# Altium PCB MainSensorV1.PcbDoc (part 1 of 3)
Units mm, origin at the board's own origin, x right, y up, seen from the top; angles counter-clockwise.
Board outline 100 x 40.64 mm, 2 copper layers (Top Layer, Bottom Layer); 164 components, 84 nets, 408 pads, 582 vias.
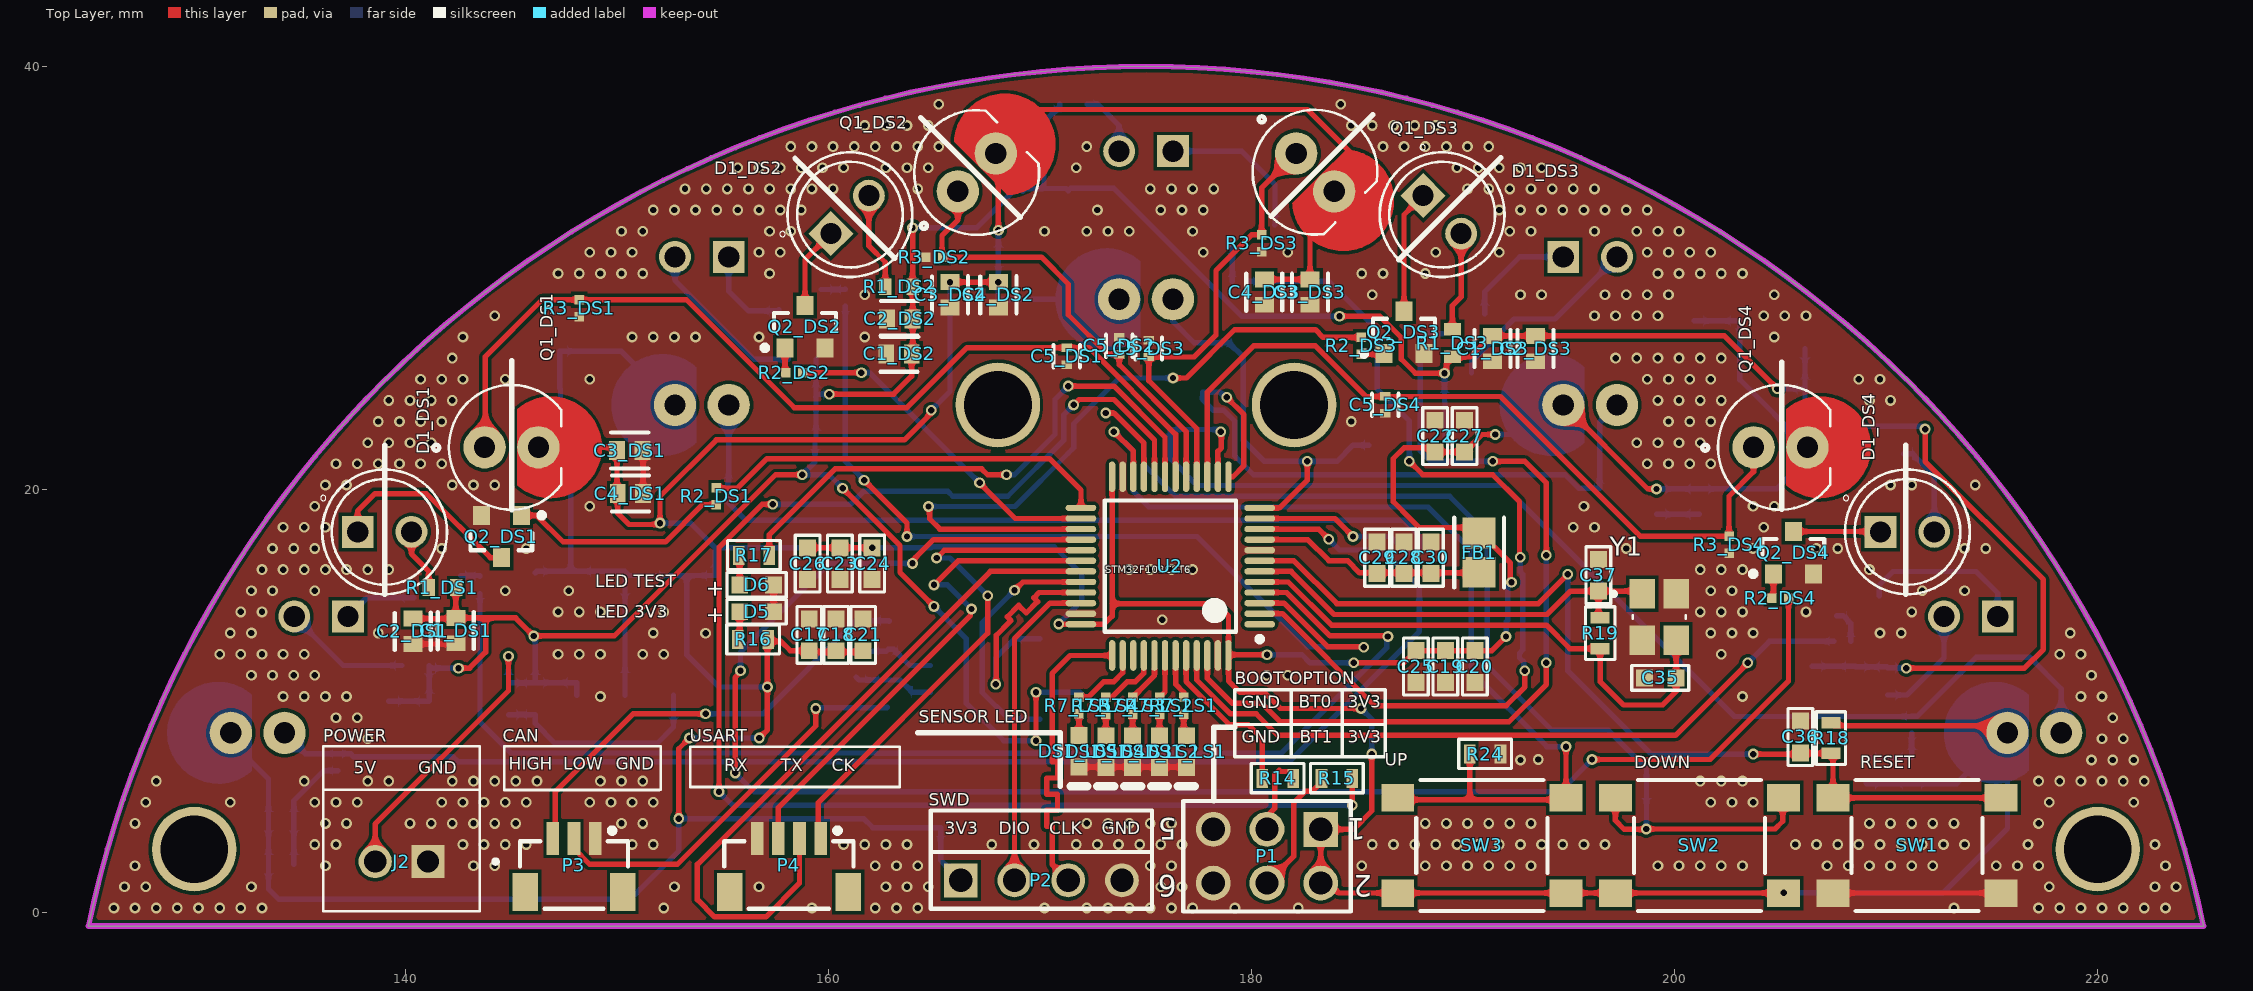
[diagram p0: Top Layer view]
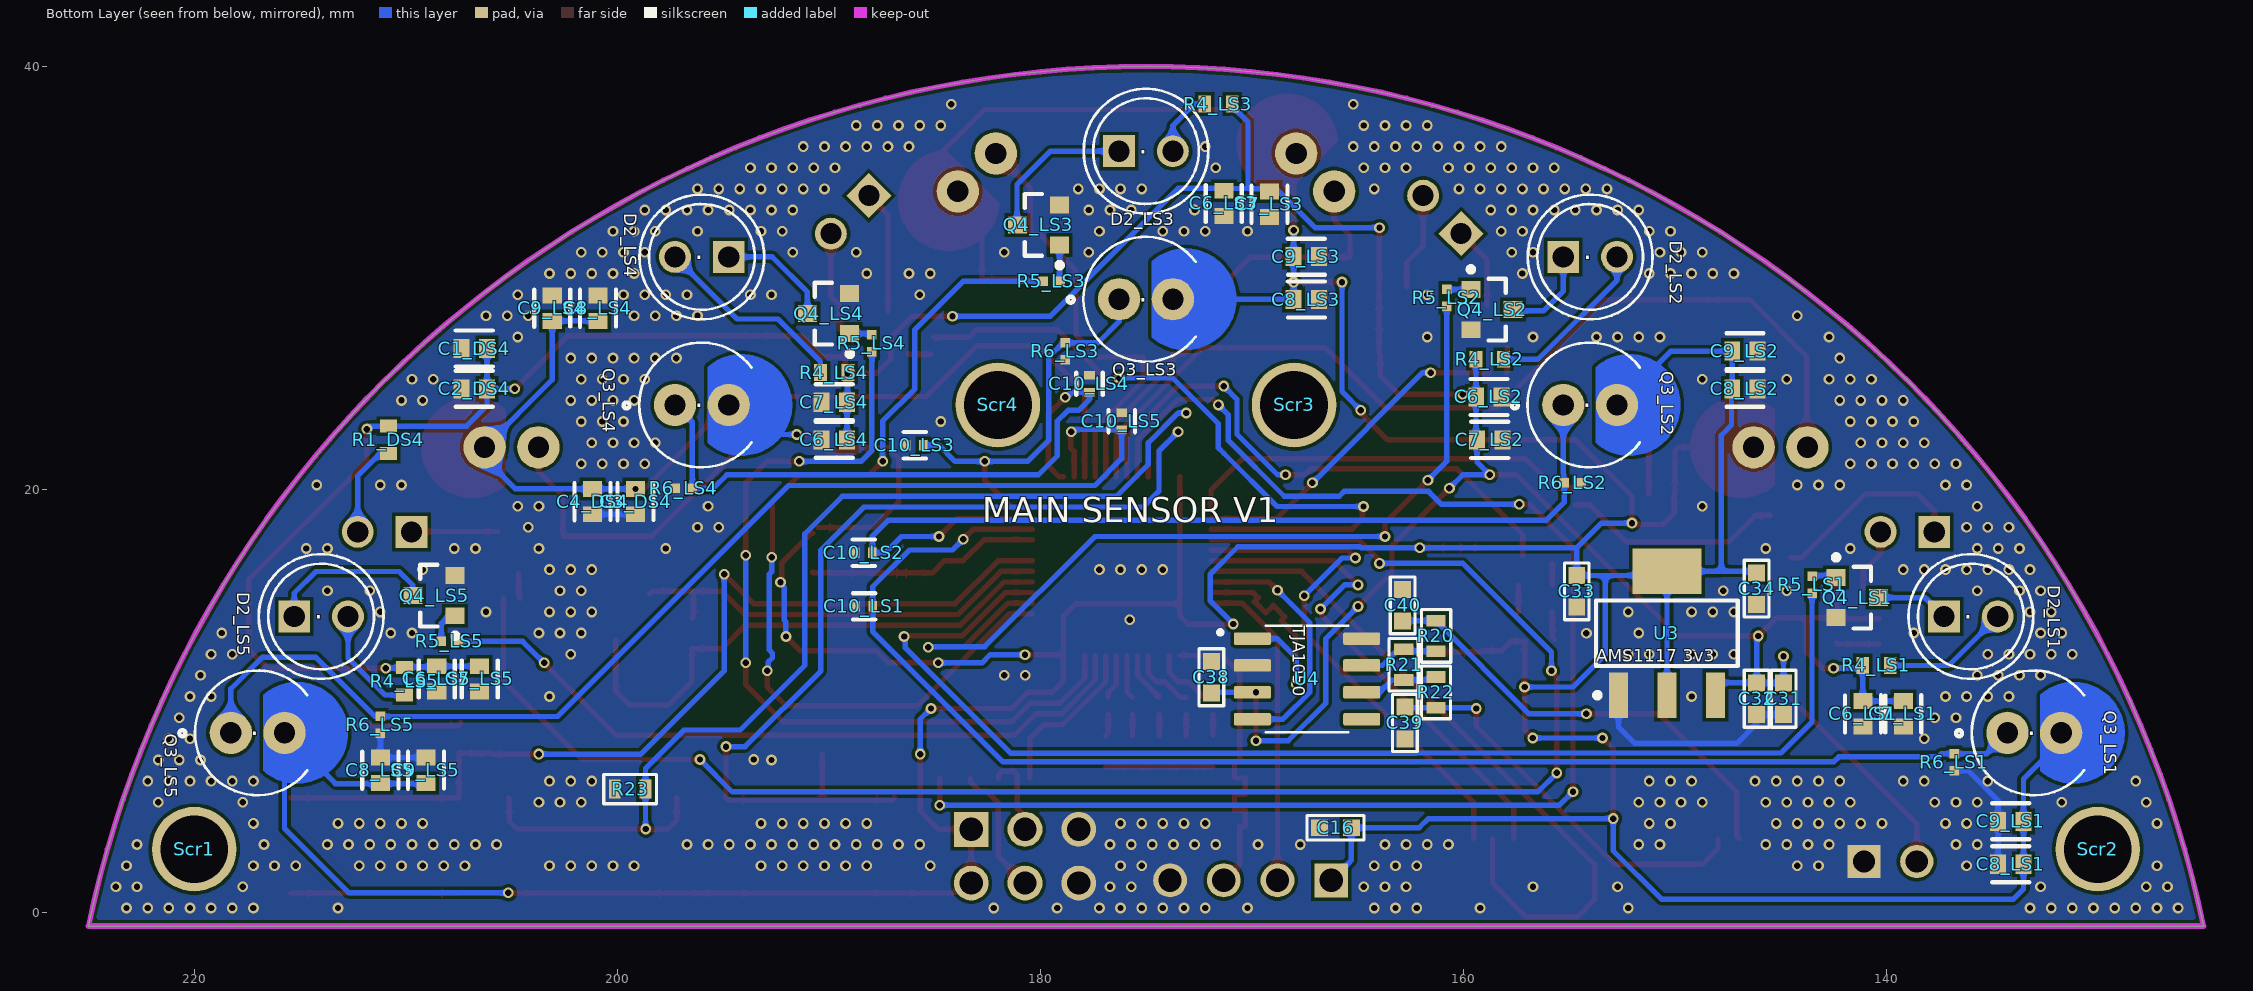
[diagram p1: Bottom Layer view, seen from below]
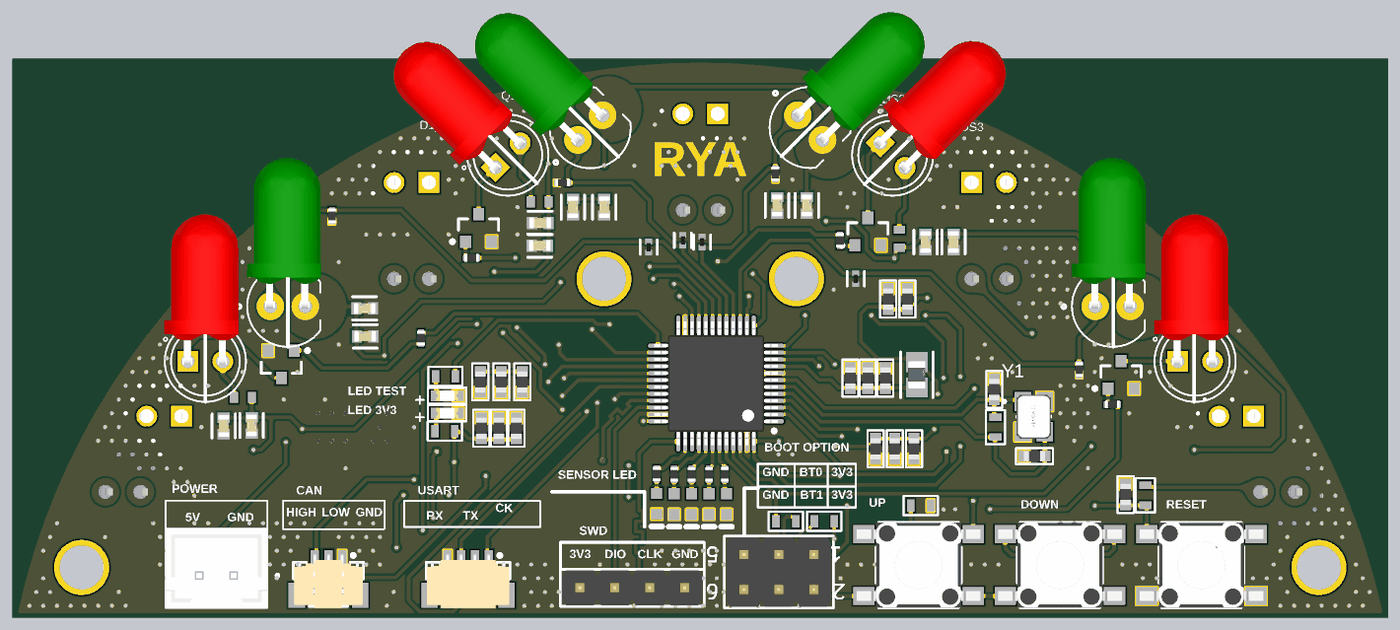
[diagram p3: 3D render of the assembled board from above, using the file's embedded part models]
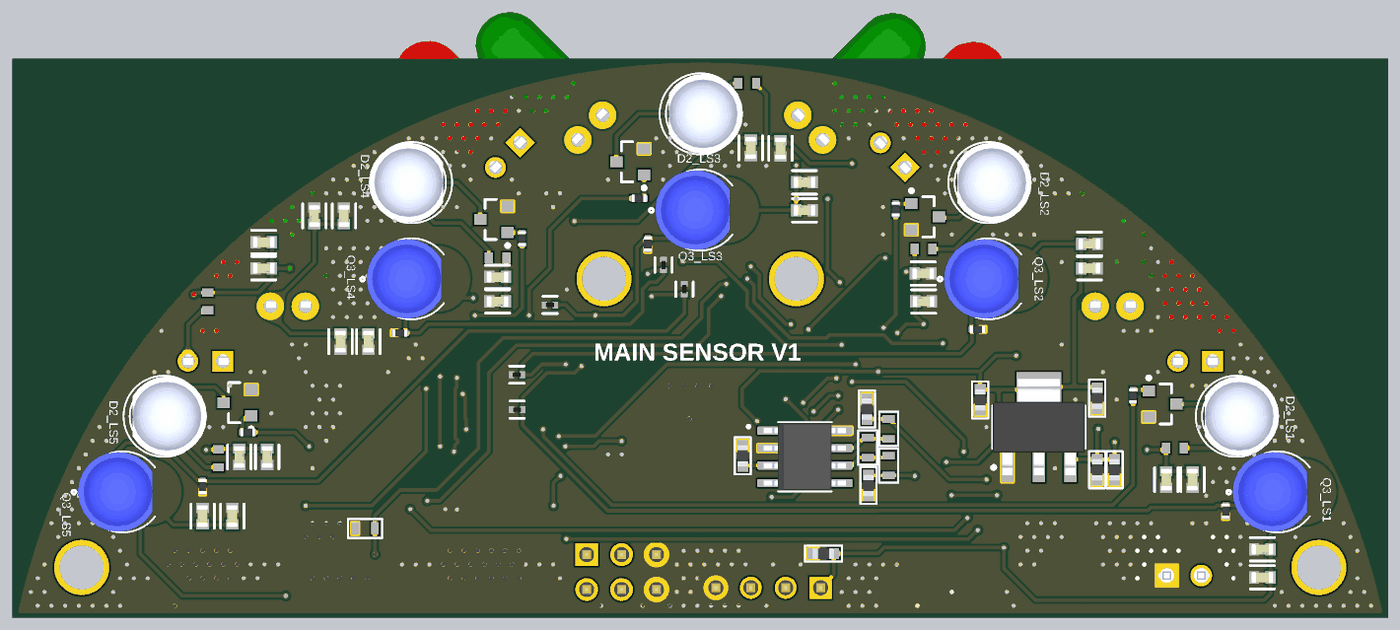
[diagram p4: 3D render of the assembled board from below, using the file's embedded part models]

## Layer stack, top to bottom
Top Solder: solder mask 0.0102, Solder Resist, Dk 3.5
Top Layer: signal copper 0.0356
Dielectric 1: dielectric 0.32, FR-4, Dk 4.8
Bottom Layer: signal copper 0.0356
Bottom Solder: solder mask 0.0102, Solder Resist, Dk 3.5

## Board outline
125,-0.635 225,-0.635 ccw(c175,-11.073)

## Design rules (kind name [scope] priority, off if disabled: settings)
Clearance [All] p1: gap=0.152 ignorepadtopadclearanceinfootprint=FALSE
HoleSize [All] p1: absolutevalues=TRUE maxlimit=20.54 minlimit=0.3 maxpercent=80.000 minpercent=20.000
MatchedLengths [InNetClass('STLINK')] p1: tolerance=25.4 checknetsindiffpair=FALSE checkdiffpairvsdiffpair=TRUE checkxsignals=TRUE checkothers=TRUE usedelayunits=TRUE delaytolerance=1.000000
PolygonConnect PolygonConnect_4 [All vs IsNamedPolygon('3V3_L02_P007')] p1: connectstyle=Direct reliefconductorwidth=0.254 reliefentries=4 polygonreliefangle="90 Angle" airgapwidth=0.254
PolygonConnect PolygonConnect_3 [All vs IsNamedPolygon('3V3_L02_P003')] p2: connectstyle=Direct reliefconductorwidth=0.254 reliefentries=4 polygonreliefangle="90 Angle" airgapwidth=0.254
PolygonConnect PolygonConnect_2 [All vs IsNamedPolygon('3V3_L02_P001')] p3: connectstyle=Direct reliefconductorwidth=0.254 reliefentries=4 polygonreliefangle="90 Angle" airgapwidth=0.254
PolygonConnect PolygonConnect_1 [All vs IsNamedPolygon('5V_L02_P000')] p4: connectstyle=Direct reliefconductorwidth=0.254 reliefentries=4 polygonreliefangle="90 Angle" airgapwidth=0.254
PolygonConnect [InNet('GND') vs InNet('GND')] p5: connectstyle=Direct reliefconductorwidth=0.254 reliefentries=4 polygonreliefangle="90 Angle" airgapwidth=0.254
RoomDefinition U_MCU [InComponentClass('U_MCU')] p1: confinementstyle=ConfineIn formatcopy=TRUE lockcomponents=FALSE outline -26.797,-41.783 24.003,-41.783 24.003,-16.383 -26.797,-16.383
RoomDefinition U_CAN_IC [InComponentClass('U_CAN_IC')] p2: confinementstyle=ConfineIn formatcopy=TRUE lockcomponents=FALSE outline -26.797,-41.783 24.003,-41.783 24.003,-16.383 -26.797,-16.383
RoomDefinition U_BUTTON [InComponentClass('U_BUTTON')] p3: confinementstyle=ConfineIn formatcopy=TRUE lockcomponents=FALSE outline -26.797,-41.783 24.003,-41.783 24.003,-16.383 -26.797,-16.383
RoutingVias [All] p1: holewidth=0.3 width=0.762 viastyle="Through Hole" minholewidth=0.3 minwidth=0.3 maxholewidth=0.3 maxwidth=0.762
SilkToSilkClearance [All] p1: silktosilkclearance=0
SilkToSolderMaskClearance [IsPad] p1: minsilkscreentomaskgap=0 clearancetoexposedcopper=TRUE
SolderMaskExpansion [All] p1: expansion=0.102 istentingtop=FALSE
SupplyNets "Schematic Supply Nets_2" [InNet('3V3')] p1: voltage=0.000
SupplyNets "Schematic Supply Nets_1" [InNet('GND')] p2: voltage=0.000
SupplyNets "Schematic Supply Nets" [InNet('5V')] p3: voltage=0.000
Width [All] p1: maxlimit=0.508 minlimit=0.254 preferedwidth=0.381 minimp=50.000000 maximp=50.000000 favimp=50.000000
27 further rules are at their usual default settings.

## Classes and differential pairs
component class U_MCU: C16 C17 C18 C19 C20 C21 C22 C23 C24 C25 C26 C27 C28 C29 C30 C31 C32 C33 C34 C35 C36 C37 D5 D6 FB1 P1 P2 R14 R15 R16 R17 R18 R19 SW1 U2 U3 Y1
component class U_CAN_IC: C38 C39 C40 R20 R21 R22 U4
component class U_BUTTON: R23 R24 SW2 SW3
component class LS5: C6_LS5 C7_LS5 C8_LS5 C9_LS5 C10_LS5 D2_LS5 DS1_LS5 Q3_LS5 Q4_LS5 R4_LS5 R5_LS5 R6_LS5 R7_LS5
component class LS4: C6_LS4 C7_LS4 C8_LS4 C9_LS4 C10_LS4 D2_LS4 DS1_LS4 Q3_LS4 Q4_LS4 R4_LS4 R5_LS4 R6_LS4 R7_LS4
component class LS3: C6_LS3 C7_LS3 C8_LS3 C9_LS3 C10_LS3 D2_LS3 DS1_LS3 Q3_LS3 Q4_LS3 R4_LS3 R5_LS3 R6_LS3 R7_LS3
channel class LINE_SENSOR: LS1 LS2 LS3 LS4 LS5
channel class DIS_SENSOR: DS1 DS2 DS3 DS4
component class Sensor: J2 P3 P4
component class LS2: C6_LS2 C7_LS2 C8_LS2 C9_LS2 C10_LS2 D2_LS2 DS1_LS2 Q3_LS2 Q4_LS2 R4_LS2 R5_LS2 R6_LS2 R7_LS2
component class LS1: C6_LS1 C7_LS1 C8_LS1 C9_LS1 C10_LS1 D2_LS1 DS1_LS1 Q3_LS1 Q4_LS1 R4_LS1 R5_LS1 R6_LS1 R7_LS1
component class Information: Scr1 Scr2 Scr3 Scr4
component class DS4: C1_DS4 C2_DS4 C3_DS4 C4_DS4 C5_DS4 D1_DS4 Q1_DS4 Q2_DS4 R1_DS4 R2_DS4 R3_DS4
component class DS3: C1_DS3 C2_DS3 C3_DS3 C4_DS3 C5_DS3 D1_DS3 Q1_DS3 Q2_DS3 R1_DS3 R2_DS3 R3_DS3
component class DS2: C1_DS2 C2_DS2 C3_DS2 C4_DS2 C5_DS2 D1_DS2 Q1_DS2 Q2_DS2 R1_DS2 R2_DS2 R3_DS2
component class DS1: C1_DS1 C2_DS1 C3_DS1 C4_DS1 C5_DS1 D1_DS1 Q1_DS1 Q2_DS1 R1_DS1 R2_DS1 R3_DS1

## Components (designator, comment, footprint, x,y, rotation, side; value= is the part's Value field where it differs from the comment)
C1_DS1 "100nF" FP-C0603C-CF-MFG 142.367,13.335 r270 top value="20 pF" (schematic designator C1)
C1_DS2 "100nF" FP-C0603C-CF-MFG 163.322,26.416 r180 top value="20 pF" (schematic designator C1)
C1_DS3 "100nF" FP-C0603C-CF-MFG 191.389,26.67 r270 top value="20 pF" (schematic designator C1)
C1_DS4 "100nF" FP-C0603C-CF-MFG 206.756,26.67 r0 bottom value="20 pF" (schematic designator C1)
C2_DS1 "10uF" FP-C0603C-CF-MFG 140.335,13.3 r270 top value="20 pF" (schematic designator C2)
C2_DS2 "10uF" FP-C0603C-CF-MFG 163.357,28.067 r180 top value="20 pF" (schematic designator C2)
C2_DS3 "10uF" FP-C0603C-CF-MFG 193.421,26.67 r270 top value="20 pF" (schematic designator C2)
C2_DS4 "10uF" FP-C0603C-CF-MFG 206.756,24.765 r0 bottom value="20 pF" (schematic designator C2)
C3_DS1 "100nF" FP-C0603C-CF-MFG 150.587,21.844 r0 top value="20 pF" (schematic designator C3)
C3_DS2 "100nF" FP-C0603C-CF-MFG 165.735,29.21 r270 top value="20 pF" (schematic designator C3)
C3_DS3 "100nF" FP-C0603C-CF-MFG 182.753,29.337 r270 top value="20 pF" (schematic designator C3)
C3_DS4 "100nF" FP-C0603C-CF-MFG 199.136,19.431 r270 bottom value="20 pF" (schematic designator C3)
C4_DS1 "10uF" FP-C0603C-CF-MFG 150.622,19.812 r0 top value="20 pF" (schematic designator C4)
C4_DS2 "10uF" FP-C0603C-CF-MFG 168.021,29.21 r270 top value="20 pF" (schematic designator C4)
C4_DS3 "10uF" FP-C0603C-CF-MFG 180.594,29.337 r270 top value="20 pF" (schematic designator C4)
C4_DS4 "10uF" FP-C0603C-CF-MFG 201.168,19.431 r270 bottom value="20 pF" (schematic designator C4)
C5_DS1 "100nF" FP-GRM15-MFG 171.25,26.308 r90 top value=0.10μF (schematic designator C5)
C5_DS2 "100nF" FP-GRM15-MFG 173.736,26.797 r270 top value=0.10μF (schematic designator C5)
C5_DS3 "100nF" FP-GRM15-MFG 175.133,26.67 r270 top value=0.10μF (schematic designator C5)
C5_DS4 "100nF" FP-GRM15-MFG 186.309,24.003 r90 top value=0.10μF (schematic designator C5)
C6_LS1 "100nF" FP-C0603C-CF-MFG 141.097,9.398 r270 bottom value="20 pF" (schematic designator C6)
C6_LS2 "100nF" FP-C0603C-CF-MFG 158.785,24.384 r180 bottom value="20 pF" (schematic designator C6)
C6_LS3 "100nF" FP-C0603C-CF-MFG 171.323,33.528 r270 bottom value="20 pF" (schematic designator C6)
C6_LS4 "100nF" FP-C0603C-CF-MFG 189.738,22.352 r0 bottom value="20 pF" (schematic designator C6)
C6_LS5 "100nF" FP-C0603C-CF-MFG 208.534,11.049 r270 bottom value="20 pF" (schematic designator C6)
C7_LS1 "10uF" FP-C0603C-CF-MFG 139.192,9.398 r270 bottom value="20 pF" (schematic designator C7)
C7_LS2 "10uF" FP-C0603C-CF-MFG 158.75,22.352 r180 bottom value="20 pF" (schematic designator C7)
C7_LS3 "10uF" FP-C0603C-CF-MFG 169.164,33.493 r270 bottom value="20 pF" (schematic designator C7)
C7_LS4 "10uF" FP-C0603C-CF-MFG 189.738,24.13 r0 bottom value="20 pF" (schematic designator C7)
C7_LS5 "10uF" FP-C0603C-CF-MFG 206.502,11.049 r270 bottom value="20 pF" (schematic designator C7)
C8_LS1 "100nF" FP-C0603C-CF-MFG 134.112,2.286 r0 bottom value="20 pF" (schematic designator C8)
C8_LS2 "100nF" FP-C0603C-CF-MFG 146.685,24.765 r180 bottom value="20 pF" (schematic designator C8)
C8_LS3 "100nF" FP-C0603C-CF-MFG 167.421,28.983 r180 bottom value="20 pF" (schematic designator C8)
C8_LS4 "100nF" FP-C0603C-CF-MFG 200.914,28.575 r90 bottom value="20 pF" (schematic designator C8)
C8_LS5 "100nF" FP-C0603C-CF-MFG 211.201,6.731 r90 bottom value="20 pF" (schematic designator C8)
C9_LS1 "10uF" FP-C0603C-CF-MFG 134.112,4.318 r0 bottom value="20 pF" (schematic designator C9)
C9_LS2 "10uF" FP-C0603C-CF-MFG 146.685,26.543 r180 bottom value="20 pF" (schematic designator C9)
C9_LS3 "10uF" FP-C0603C-CF-MFG 167.421,31.015 r180 bottom value="20 pF" (schematic designator C9)
C9_LS4 "10uF" FP-C0603C-CF-MFG 203.073,28.575 r90 bottom value="20 pF" (schematic designator C9)
C9_LS5 "10uF" FP-C0603C-CF-MFG 209.042,6.731 r90 bottom value="20 pF" (schematic designator C9)
C10_LS1 "100nF" FP-GRM15-MFG 188.322,14.478 r180 bottom value=0.10μF (schematic designator C10)
C10_LS2 "100nF" FP-GRM15-MFG 188.341,17.018 r180 bottom value=0.10μF (schematic designator C10)
C10_LS3 "100nF" FP-GRM15-MFG 185.928,22.098 r180 bottom value=0.10μF (schematic designator C10)
C10_LS4 "100nF" FP-GRM15-MFG 177.673,25 r270 bottom value=0.10μF (schematic designator C10)
C10_LS5 "100nF" FP-GRM15-MFG 176.149,23.241 r270 bottom value=0.10μF (schematic designator C10)
C16 "100 nF" CAP_0603 165.989,3.937 r180 bottom value="100 nF, 50 VDC"
C17 "10 uF" CAP_0603 159.004,13.081 r270 top value="10 uF, 10 VDC"
C18 "100 nF" CAP_0603 160.274,13.081 r270 top value="100 nF, 50 VDC"
C19 "100 nF" CAP_0603 189.23,11.684 r90 top value="100 nF, 50 VDC"
C20 "100 nF" CAP_0603 190.627,11.684 r90 top value="100 nF, 50 VDC"
C21 "100 nF" CAP_0603 161.544,13.081 r270 top value="100 nF, 50 VDC"
C22 "100 nF" CAP_0603 188.595,22.479 r270 top value="100 nF, 50 VDC"
C23 "100 nF" CAP_0603 160.604,16.549 r90 top value="100 nF, 50 VDC"
C24 "100 nF" CAP_0603 162.128,16.549 r90 top value="100 nF, 50 VDC"
C25 "100 nF" CAP_0603 187.833,11.684 r90 top value="100 nF, 50 VDC"
C26 "100 nF" CAP_0603 159.08,16.549 r90 top value="100 nF, 50 VDC"
C27 "100 nF" CAP_0603 189.992,22.479 r270 top value="100 nF, 50 VDC"
C28 "100 nF" CAP_0603 187.122,16.725 r270 top value="100 nF, 50 VDC"
C29 "10 nF" CAP_0603 185.852,16.725 r270 top value="10 nF, 50 VDC"
C30 "1 uF" CAP_0603 188.392,16.725 r270 top value="1 uF, 16 VDC"
C31 "10 uF" CAP_0603 144.78,10.16 r90 bottom value="10 uF, 10 VDC"
C32 "1 uF" CAP_0603 146.05,10.16 r90 bottom value="1 uF, 16 VDC"
C33 "1 uF" CAP_0603 154.559,15.24 r90 bottom value="1 uF, 16 VDC"
C34 "10 uF" CAP_0603 146.05,15.367 r90 bottom value="10 uF, 10 VDC"
C35 "22 pF" CAP_0603 199.263,11.176 r180 top value="22 pF, 50 VDC"
C36 "1 uF" CAP_0603 205.867,8.255 r270 top value="1 uF, 35 VDC"
C37 "22 pF" CAP_0603 196.469,16.002 r90 top value="22 pF, 50 VDC"
C38 "100 nF" CAP_0603 171.831,11.176 r90 bottom value="100 nF, 50 VDC"
C39 "30 pF" CAP_0603 162.687,9.017 r90 bottom value="33 pF, 50 VDC"
C40 "30 pF" CAP_0603 162.941,14.478 r270 bottom value="33 pF, 50 VDC"
D1_DS1 "CMP-006-00021-1" LED_WP7113SRC/DU 139,18 r0 top value=10pH (schematic designator D1)
D1_DS2 "CMP-006-00021-1" LED_WP7113SRC/DU 161,33 r45 top value=10pH (schematic designator D1)
D1_DS3 "CMP-006-00021-1" LED_WP7113SRC/DU 189,33 r315 top value=10pH (schematic designator D1)
D1_DS4 "CMP-006-00021-1" LED_WP7113SRC/DU 211,18 r0 top value=10pH (schematic designator D1)
D2_LS1 "WP7113SRC/DU" NotBenddedIR 136,14 r180 bottom (schematic designator D2)
D2_LS2 "WP7113SRC/DU" NotBenddedIR 154,31 r180 bottom (schematic designator D2)
D2_LS3 "WP7113SRC/DU" NotBenddedIR 175,36 r180 bottom (schematic designator D2)
D2_LS4 "WP7113SRC/DU" NotBenddedIR 196,31 r0 bottom (schematic designator D2)
D2_LS5 "WP7113SRC/DU" NotBenddedIR 214,14 r180 bottom (schematic designator D2)
D5 "Red, 2V" WL-SMCW_0603_H=0.7mm 156.591,14.224 r180 top
D6 "Red, 2V" WL-SMCW_0603_H=0.7mm 156.591,15.494 r180 top
DS1_LS1 "White LED" AVAG-HSMW-C191_V 176.911,7.613 r270 top (schematic designator DS1)
DS1_LS2 "White LED" AVAG-HSMW-C191_V 175.641,7.613 r270 top (schematic designator DS1)
DS1_LS3 "White LED" AVAG-HSMW-C191_V 174.371,7.613 r270 top (schematic designator DS1)
DS1_LS4 "White LED" AVAG-HSMW-C191_V 173.101,7.613 r270 top (schematic designator DS1)
DS1_LS5 "White LED" AVAG-HSMW-C191_V 171.831,7.632 r270 top (schematic designator DS1)
FB1 "2A 120Ohm" FP-BLM21-0_2-t0_85-e0_5-IPC_A 190.754,17.018 r90 top
J2 "B2B-XH-A" JST_B2B-XH-A 139.807,2.938 r0 top
P1 "61300621121" 61300621121 180.721,2.667 r180 top
P2 "61300411121" 61300411121 170.053,1.524 r0 top
P3 "665303124022" 665303124022 147.955,1.778 r180 top value="1A, 125 V (AC)"
P4 "665304124022" 665304124022 158.115,1.778 r180 top value="1A, 125 V (AC)"
Q1_DS1 "SFH_313_FA-3/4" XDCR_SFH_313_FA-3/4 145,22 r0 top (schematic designator Q1)
Q1_DS2 "SFH_313_FA-3/4" XDCR_SFH_313_FA-3/4 167,35 r45 top (schematic designator Q1)
Q1_DS3 "SFH_313_FA-3/4" XDCR_SFH_313_FA-3/4 183,35 r315 top (schematic designator Q1)
Q1_DS4 "SFH_313_FA-3/4" XDCR_SFH_313_FA-3/4 205,22 r0 top (schematic designator Q1)
Q2_DS1 "BC817-16LT1G" ONSC-SOT-23-3-318-08_V 144.526,17.78 r270 top (schematic designator Q2)
Q2_DS2 "BC817-16LT1G" ONSC-SOT-23-3-318-08_V 158.877,27.702 r90 top (schematic designator Q2)
Q2_DS3 "BC817-16LT1G" ONSC-SOT-23-3-318-08_V 187.198,27.432 r90 top (schematic designator Q2)
Q2_DS4 "BC817-16LT1G" ONSC-SOT-23-3-318-08_V 205.613,17.018 r90 top (schematic designator Q2)
Q3_LS1 "SFH_313_FA-3/4" NotBendded 133,8.5 r180 bottom (schematic designator Q3)
Q3_LS2 "SFH_313_FA-3/4" NotBendded 154,24 r180 bottom (schematic designator Q3)
Q3_LS3 "SFH_313_FA-3/4" NotBendded 175,29 r180 bottom (schematic designator Q3)
Q3_LS4 "SFH_313_FA-3/4" NotBendded 196,24 r180 bottom (schematic designator Q3)
Q3_LS5 "SFH_313_FA-3/4" NotBendded 217,8.5 r180 bottom (schematic designator Q3)
Q4_LS1 "BC817-16LT1G" ONSC-SOT-23-3-318-08_V 141.375,14.892 r180 bottom (schematic designator Q4)
Q4_LS2 "BC817-16LT1G" ONSC-SOT-23-3-318-08_V 158.639,28.509 r180 bottom (schematic designator Q4)
Q4_LS3 "BC817-16LT1G" ONSC-SOT-23-3-318-08_V 180.086,32.512 r0 bottom (schematic designator Q4)
Q4_LS4 "BC817-16LT1G" ONSC-SOT-23-3-318-08_V 190.008,28.321 r0 bottom (schematic designator Q4)
Q4_LS5 "BC817-16LT1G" ONSC-SOT-23-3-318-08_V 208.661,14.986 r0 bottom (schematic designator Q4)
R1_DS1 "75 , 0603" RESC1608X55X25LL10T15 141.732,15.367 r0 top (schematic designator R1)
R1_DS2 "75 , 0603" RESC1608X55X25LL10T15 163.322,29.591 r0 top (schematic designator R1)
R1_DS3 "75 , 0603" RESC1608X55X25LL10T15 189.484,26.924 r270 top (schematic designator R1)
R1_DS4 "75 , 0603" RESC1608X55X25LL10T15 210.82,22.352 r90 bottom (schematic designator R1)
R2_DS1 "1K" RESC1005X40X25LL05T05 154.686,19.685 r90 top (schematic designator R2)
R2_DS2 "1K" RESC1005X40X25LL05T05 158.369,25.527 r0 top (schematic designator R2)
R2_DS3 "1K" RESC1005X40X25LL05T05 185.166,26.797 r90 top (schematic designator R2)
R2_DS4 "1K" RESC1005X40X25LL05T05 204.978,14.859 r0 top (schematic designator R2)
R3_DS1 "10K" RESC1005X40X25LL05T05 148.209,28.575 r270 top (schematic designator R3)
R3_DS2 "10K" RESC1005X40X25LL05T05 164.992,30.988 r180 top (schematic designator R3)
R3_DS3 "10K" RESC1005X40X25LL05T05 180.467,31.642 r270 top (schematic designator R3)
R3_DS4 "10K" RESC1005X40X25LL05T05 202.565,17.399 r270 top (schematic designator R3)
R4_LS1 "75 , 0603" RESC1608X55X25LL10T15 140.462,11.684 r0 bottom (schematic designator R4)
R4_LS2 "75 , 0603" RESC1608X55X25LL10T15 158.75,26.162 r0 bottom (schematic designator R4)
R4_LS3 "75 , 0603" RESC1608X55X25LL10T15 171.577,38.227 r180 bottom (schematic designator R4)
R4_LS4 "75 , 0603" RESC1608X55X25LL10T15 189.738,25.527 r180 bottom (schematic designator R4)
R4_LS5 "75 , 0603" RESC1608X55X25LL10T15 210.058,10.937 r90 bottom (schematic designator R4)
R5_LS1 "1K" RESC1005X40X25LL05T05 143.51,15.494 r270 bottom (schematic designator R5)
R5_LS2 "1K" RESC1005X40X25LL05T05 160.782,29.064 r270 bottom (schematic designator R5)
R5_LS3 "1K" RESC1005X40X25LL05T05 179.451,29.845 r0 bottom (schematic designator R5)
R5_LS4 "1K" RESC1005X40X25LL05T05 187.96,26.924 r270 bottom (schematic designator R5)
R5_LS5 "1K" RESC1005X40X25LL05T05 207.918,12.827 r180 bottom (schematic designator R5)
R6_LS1 "10K" RESC1005X40X25LL05T05 136.779,7.112 r270 bottom (schematic designator R6)
R6_LS2 "10K" RESC1005X40X25LL05T05 154.832,20.32 r180 bottom (schematic designator R6)
R6_LS3 "10K" RESC1005X40X25LL05T05 178.816,26.543 r270 bottom (schematic designator R6)
R6_LS4 "10K" RESC1005X40X25LL05T05 196.85,20.066 r0 bottom (schematic designator R6)
R6_LS5 "10K" RESC1005X40X25LL05T05 211.201,8.89 r270 bottom (schematic designator R6)
R7_LS1 "2K" RESC1005X40X25LL05T05 176.784,9.779 r270 top (schematic designator R7)
R7_LS2 "2K" RESC1005X40X25LL05T05 175.641,9.772 r270 top (schematic designator R7)
R7_LS3 "2K" RESC1005X40X25LL05T05 174.371,9.772 r270 top (schematic designator R7)
R7_LS4 "2K" RESC1005X40X25LL05T05 173.101,9.772 r270 top (schematic designator R7)
R7_LS5 "2K" RESC1005X40X25LL05T05 171.831,9.791 r270 top (schematic designator R7)
R14 "100 kOhm" resistor_0603 181.229,6.35 r0 top value="100 KOhm, 1/4 W"
R15 "100 kOhm" resistor_0603 184.023,6.35 r0 top value="100 KOhm, 1/4 W"
R16 "1 kOhm" resistor_0603 156.423,12.913 r0 top value="1 KOhm, 1/4 W"
R17 "1 kOhm" resistor_0603 156.464,16.891 r0 top value="1 KOhm, 1/4 W"
R18 "10 kOhm" resistor_0603 207.391,8.255 r90 top value="10 KOhm, 1/4 W"
R19 "1 MOhm" resistor_0603 196.469,13.208 r270 top value="1 MOhm, 1/4 W"
R20 "0 Ohm" resistor_0603 161.29,13.081 r270 bottom value="0 Ohm, 1/4 W"
R21 "120 Ohm" resistor_0603 162.814,11.721 r90 bottom value="120 Ohm, 1/4 W"
R22 "0 Ohm" resistor_0603 161.29,10.414 r90 bottom value="0 Ohm, 1/4 W"
R23 "1k Ohm" resistor_0603 199.39,5.842 r0 bottom value="1 KOhm, 1/4 W"
R24 "1k Ohm" resistor_0603 191.039,7.493 r0 top value="1 KOhm, 1/4 W"
Scr1 "M3Screw" M3Screw 220,3 r180 bottom
Scr2 "M3Screw" M3Screw 130,3 r180 bottom
Scr3 "M3Screw" M3Screw 168,24 r180 bottom
Scr4 "M3Screw" M3Screw 182,24 r180 bottom
SW1 "430152043826" WS-TASV_L6W6H4.3_4301x20438x6 211.455,3.175 r180 top
SW2 "430152043826" WS-TASV_L6W6H4.3_4301x20438x6 201.168,3.175 r180 top
SW3 "430152043826" WS-TASV_L6W6H4.3_4301x20438x6 190.881,3.175 r180 top
U2 "STM32F103C8T6" STM32F103C8T6 176.149,16.383 r180 top
U3 "3.3V, 1A" "AMS1117-3.3V SOT223" 150.368,13.208 r90 bottom
U4 "TJA1050T" SOIC127P600X175-8N 167.386,11.049 r180 bottom
Y1 "ABM8AIG-8.000MHZ-8-V1R-T" XTAL_ABM8AIG-8.000MHZ-8-V1R-T 199.263,13.97 r0 top

## Footprints (in the part's own frame and the unit in brackets; to place one, negate y for a bottom-side part, rotate by r counter-clockwise, add the part's x,y. Pads: shape width x height; smd on the part's side, far side on the other; paste and mask are expansions set on the pad)
61300411121 [mm] "Pin Header, pitch 2.54 mm, THT, Vertical, single row, 4p"
  rect 1.6x1.6 hole 1.1: 1(-3.81,0)
  round 1.6 hole 1.1: 2(-1.27,0) 3(1.27,0) 4(3.81,0)
  silkscreen extent -5.23,-1.35 5.23,1.35, body extent -5.08,-1.27 5.08,1.27, height 8.57
61300621121 [mm] "Pin Header, pitch 2.54 mm, THT, Vertical, dual row, 6p"
  rect 1.65x1.65 hole 1.1: 1(-2.54,-1.27)
  round 1.65 hole 1.1: 2(-2.54,1.27) 3(0,-1.27) 4(0,1.27) 5(2.54,-1.27) 6(2.54,1.27)
  silkscreen extent -3.96,-2.62 3.96,2.62, body extent -3.81,-2.54 3.81,2.54, height 8.59
665303124022 [mm] "1.00 mm SMT Male Vertical Shrouded Header, 3p"
  rect 0.6x1.55 smd: 1(-1,-1.725) 2(0,-1.725) 3(1,-1.725)
  rect 1.2x1.8 smd: MP1(-2.3,0.8) MP2(2.3,0.8)
  silkscreen extent -2.55,-2.22 2.55,1.6, body extent -2.5,-2.19 2.5,1.77, height 4.79
665304124022 [mm] "1.00 mm SMT Male Vertical Shrouded Header, 4p"
  rect 0.6x1.55 smd: 1(-1.5,-1.725) 2(-0.5,-1.725) 3(0.5,-1.725) 4(1.5,-1.725)
  rect 1.2x1.8 smd: MP1(-2.8,0.8) MP2(2.8,0.8)
  silkscreen extent -3.05,-2.22 3.05,1.6, body extent -3,-2.19 3,1.77, height 4.79
"AMS1117-3.3V SOT223" [mm] "SOT223, 4-Leads, Body 6.51x7.00mm, Pitch 2.29mm"
  rect 2.15x0.9 smd: 1(-2.93,2.29) 2(-2.93,0) 3(-2.93,-2.29)
  rect 2.15x3.25 smd: 4(2.93,0)
  silkscreen extent -3.05,-3.35 1.55,3.42, body extent -3.5,-3.35 3.5,3.35, height 1.8
AVAG-HSMW-C191_V [mm] "SMD, 2-Leads, Body 1.6x0.8mm"
  rect 0.8x0.8 smd: 1(-0.75,0) 2(0.75,0)
  silkscreen extent 1.65,-0.4 1.65,0.4, body extent -0.8,-0.4 0.8,0.4, height 0.7
CAP_0603 [mm]
  rect 0.8x0.8 smd: 1(-0.801,0.076) 2(0.699,0.076)
  silkscreen extent -1.4,-0.51 1.3,0.66, body extent -0.85,-0.32 0.75,0.48, height 0.8
FP-BLM21-0_2-t0_85-e0_5-IPC_A [mm]
  rect 1.455x1.556 smd paste+0 mask+0: 1(-0.926,0) 2(0.926,0)
  silkscreen extent -1.65,-1.18 1.65,1.18, body extent -2.15,-1.28 2.15,1.28, height 0.25
FP-C0603C-CF-MFG [mm]
  rect 0.75x0.9 smd paste+0 mask+0: 1(-0.6,0) 2(0.6,0)
  silkscreen extent -0.87,-0.85 0.88,0.85, body extent -0.8,-0.4 0.8,0.4, height 0.87
FP-GRM15-MFG [mm]
  rect 0.4x0.5 smd paste+0 mask+0: 1(-0.4,0) 2(0.4,0)
  silkscreen extent -0.53,-0.63 0.53,0.63, body extent -0.7,-0.38 0.7,0.38, height 0.25
JST_B2B-XH-A [mm]
  rect 1.575x1.575 / inner round 1.575 / far side rect 1.575x1.575 hole 1.05: 1(1.25,-0.525)
  round 1.575 hole 1.05: 2(-1.25,-0.525)
  silkscreen extent -3.7,-2.88 4.54,2.88, body extent -3.7,-2.88 3.7,2.88, height 7
LED_WP7113SRC/DU [mm]
  round 1.508 hole 1: A(1.27,0)
  rect 1.508x1.508 hole 1: C(-1.27,0)
  silkscreen extent -3.03,-2.95 2.95,2.95, body extent -2.99,-0.27 2.41,10.68, height 5.95
M3Screw [mm]
  round 4 hole 3.2: 13(0,0)
  body extent -2.75,-2.75 2.74,2.75, height 4.98
NotBendded [mm]
  round 2 hole 1 mask+0: 1(-1.27,0) 2(1.27,0)
  Top Layer region: 1.87,2.4 1.895,2.4 2.028,2.394 2.152,2.383 2.275,2.364 2.398,2.34 2.519,2.309 2.638,2.272 2.755,2.229 2.869,2.179 2.981,2.124 3.09,2.063 3.195,1.997 3.297,1.925 3.396,1.848 3.49,1.766 3.579,1.68 3.664,1.589 3.745,1.493 3.82,1.394 3.89,1.29 3.954,1.184 4.013,1.074 4.066,0.961 4.114,0.846 4.155,0.728 4.19,0.608 4.219,0.487 4.241,0.364 4.257,0.241 4.267,0.116 4.27,0 4.267,-0.116 4.257,-0.241 4.241,-0.364 4.219,-0.487 4.19,-0.608 4.155,-0.728 4.114,-0.846 4.066,-0.961 4.013,-1.074 3.954,-1.184 3.89,-1.29 3.82,-1.394 3.745,-1.493 3.664,-1.589 3.579,-1.68 3.49,-1.766 3.396,-1.848 3.297,-1.925 3.195,-1.997 3.09,-2.063 2.981,-2.124 2.869,-2.179 2.755,-2.229 2.638,-2.272 2.519,-2.309 2.398,-2.34 2.275,-2.364 2.152,-2.383 2.028,-2.394 1.895,-2.4 1.87,-2.4 1.827,-2.4 1.768,-2.399 1.71,-2.396 1.652,-2.392 1.593,-2.387 1.535,-2.38 1.478,-2.371 1.42,-2.361 1.363,-2.35 1.306,-2.337 1.249,-2.323 1.193,-2.307 1.137,-2.29 1.081,-2.272 1.026,-2.252 0.972,-2.231 0.918,-2.209 0.864,-2.185 0.812,-2.16 0.76,-2.133 0.708,-2.105 0.657,-2.076 0.608,-2.046 0.558,-2.014 0.51,-1.982 0.462,-1.948 0.416,-1.912 0.37,-1.876 0.325,-1.839 0.27,-1.79 0.27,0.06 0.27,1.79 0.325,1.839 0.37,1.876 0.416,1.912 0.462,1.948 0.51,1.982 0.558,2.014 0.608,2.046 0.657,2.076 0.708,2.105 0.76,2.133 0.812,2.16 0.864,2.185 0.918,2.209 0.972,2.231 1.026,2.252 1.081,2.272 1.137,2.29 1.193,2.307 1.249,2.323 1.306,2.337 1.363,2.35 1.42,2.361 1.478,2.371 1.535,2.38 1.593,2.387 1.652,2.392 1.71,2.396 1.768,2.399 1.827,2.4
  silkscreen extent -3.7,-2.95 2.35,2.95, body extent -3.26,-2.9 2.14,2.9, height 10.12
NotBenddedIR [mm]
  round 1.508 hole 1: A(1.27,0)
  rect 1.508x1.508 hole 1: C(-1.27,0)
  silkscreen extent -2.95,-2.95 2.95,2.95, body extent -2.29,-2.9 3.1,2.9, height 10.27
ONSC-SOT-23-3-318-08_V [mm] "SOT23, 3-Leads, Body 2.92x1.3mm, Pitch 0.95mm"
  rect 0.9x0.8 smd: 1(-1,0.95) 2(-1,-0.95) 3(1,0)
  silkscreen extent -1.12,-1.46 0.65,2.03, body extent -0.65,-1.46 0.65,1.46, height 1.11
RESC1005X40X25LL05T05 [mm] "Chip Resistor, 2-Leads, Body 1.05x0.55mm, IPC High Density"
  rect 0.45x0.45 smd: 1(-0.4,0) 2(0.4,0)
  body extent -0.53,-0.28 0.53,0.28, height 0.4
RESC1608X55X25LL10T15 [mm] "Chip Resistor, 2-Leads, Body 1.60x0.80mm, IPC High Density"
  rect 0.6x0.8 smd: 1(-0.65,0) 2(0.65,0)
  body extent -0.85,-0.45 0.85,0.45, height 0.55
resistor_0603 [mm]
  rect 0.55x0.9 smd: 1(-0.725,0) 2(0.725,0)
  silkscreen extent -1.25,-0.69 1.24,0.7, body extent -0.8,-0.45 0.8,0.45, height 0.5
SOIC127P600X175-8N [mm]
  rrect25% 1.75x0.59 smd: 1(-2.585,1.905) 2(-2.585,0.635) 3(-2.585,-0.635) 4(-2.585,-1.905) 5(2.585,-1.905) 6(2.585,-0.635) 7(2.585,0.635) 8(2.585,1.905)
  silkscreen extent -4.2,-2.52 1.95,2.52, body extent -3,-2.45 3,2.45, height 1.75
STM32F103C8T6 [mm] "TSQFP, 48-Leads, Body 7.00x7.00mm, Pitch 0.50mm, IPC Medium Density"
  oval 1.45x0.3 smd: 1(-4.225,2.75) 2(-4.225,2.25) 3(-4.225,1.75) 4(-4.225,1.25) 5(-4.225,0.75) 6(-4.225,0.25) 7(-4.225,-0.25) 8(-4.225,-0.75) 9(-4.225,-1.25) 10(-4.225,-1.75) 11(-4.225,-2.25) 12(-4.225,-2.75) 25(4.225,-2.75) 26(4.225,-2.25) 27(4.225,-1.75) 28(4.225,-1.25) 29(4.225,-0.75) 30(4.225,-0.25) 31(4.225,0.25) 32(4.225,0.75) 33(4.225,1.25) 34(4.225,1.75) 35(4.225,2.25) 36(4.225,2.75)
  oval 0.3x1.45 smd: 13(-2.75,-4.225) 14(-2.25,-4.225) 15(-1.75,-4.225) 16(-1.25,-4.225) 17(-0.75,-4.225) 18(-0.25,-4.225) 19(0.25,-4.225) 20(0.75,-4.225) 21(1.25,-4.225) 22(1.75,-4.225) 23(2.25,-4.225) 24(2.75,-4.225) 37(2.75,4.225) 38(2.25,4.225) 39(1.75,4.225) 40(1.25,4.225) 41(0.75,4.225) 42(0.25,4.225) 43(-0.25,4.225) 44(-0.75,4.225) 45(-1.25,4.225) 46(-1.75,4.225) 47(-2.25,4.225) 48(-2.75,4.225)
  silkscreen extent -4.35,-3.1 3.1,3.57, body extent -4.5,-4.5 4.5,4.5, height 1.6
WL-SMCW_0603_H=0.7mm [mm] "SMD Mono-color Chip LED, body 1.6x0.8mm"
  rect 0.8x0.8 smd: 1(-0.8,0) 2(0.8,0)
  silkscreen extent -1.4,-0.58 1.4,0.58, body extent -0.8,-0.4 0.8,0.4, height 0.7
WS-TASV_L6W6H4.3_4301x20438x6 [mm] "SMD Tact Switch, body 6x6mm"
  rect 1.55x1.3 smd: A1(-3.975,2.25) A2(3.975,2.25) B1(-3.975,-2.25) B2(3.975,-2.25)
  silkscreen extent -3.1,-3.1 3.1,3.1, body extent -4.5,-3.1 4.5,3.1, height 4.3
XDCR_SFH_313_FA-3/4 [mm]
  round 2 hole 1 mask+0: 1(-1.27,0) 2(1.27,0)
  Top Layer region: 1.87,2.4 1.895,2.4 2.028,2.394 2.152,2.383 2.275,2.364 2.398,2.34 2.519,2.309 2.638,2.272 2.755,2.229 2.869,2.179 2.981,2.124 3.09,2.063 3.195,1.997 3.297,1.925 3.396,1.848 3.49,1.766 3.579,1.68 3.664,1.589 3.745,1.493 3.82,1.394 3.89,1.29 3.954,1.184 4.013,1.074 4.066,0.961 4.114,0.846 4.155,0.728 4.19,0.608 4.219,0.487 4.241,0.364 4.257,0.241 4.267,0.116 4.27,0 4.267,-0.116 4.257,-0.241 4.241,-0.364 4.219,-0.487 4.19,-0.608 4.155,-0.728 4.114,-0.846 4.066,-0.961 4.013,-1.074 3.954,-1.184 3.89,-1.29 3.82,-1.394 3.745,-1.493 3.664,-1.589 3.579,-1.68 3.49,-1.766 3.396,-1.848 3.297,-1.925 3.195,-1.997 3.09,-2.063 2.981,-2.124 2.869,-2.179 2.755,-2.229 2.638,-2.272 2.519,-2.309 2.398,-2.34 2.275,-2.364 2.152,-2.383 2.028,-2.394 1.895,-2.4 1.87,-2.4 1.827,-2.4 1.768,-2.399 1.71,-2.396 1.652,-2.392 1.593,-2.387 1.535,-2.38 1.478,-2.371 1.42,-2.361 1.363,-2.35 1.306,-2.337 1.249,-2.323 1.193,-2.307 1.137,-2.29 1.081,-2.272 1.026,-2.252 0.972,-2.231 0.918,-2.209 0.864,-2.185 0.812,-2.16 0.76,-2.133 0.708,-2.105 0.657,-2.076 0.608,-2.046 0.558,-2.014 0.51,-1.982 0.462,-1.948 0.416,-1.912 0.37,-1.876 0.325,-1.839 0.27,-1.79 0.27,0.06 0.27,1.79 0.325,1.839 0.37,1.876 0.416,1.912 0.462,1.948 0.51,1.982 0.558,2.014 0.608,2.046 0.657,2.076 0.708,2.105 0.76,2.133 0.812,2.16 0.864,2.185 0.918,2.209 0.972,2.231 1.026,2.252 1.081,2.272 1.137,2.29 1.193,2.307 1.249,2.323 1.306,2.337 1.363,2.35 1.42,2.361 1.478,2.371 1.535,2.38 1.593,2.387 1.652,2.392 1.71,2.396 1.768,2.399 1.827,2.4
  silkscreen extent -3.7,-2.95 2.35,2.95, body extent -2.99,-0.14 2.41,10.81, height 5.95
XTAL_ABM8AIG-8.000MHZ-8-V1R-T [mm]
  rect 1.2x1.4 smd: 1(-0.8,1.1) 2(-0.8,-1.1) 3(0.8,-1.1) 4(0.8,1.1)
  silkscreen extent -2.25,-0.08 1.25,1.2, body extent -1.25,-1.6 1.25,1.6, height 0.8

## Part data
C1_DS1 C1_DS2 C1_DS3 C1_DS4 C2_DS1 C2_DS2 C2_DS3 C2_DS4 C3_DS1 C3_DS2 C3_DS3 C3_DS4 C4_DS1 C4_DS2 C4_DS3 C4_DS4 C6_LS1 C6_LS2 C6_LS3 C6_LS4 C6_LS5 C7_LS1 C7_LS2 C7_LS3 C7_LS4 C7_LS5 C8_LS1 C8_LS2 C8_LS3 C8_LS4 C8_LS5 C9_LS1 C9_LS2 C9_LS3 C9_LS4 C9_LS5: library part CMP-1035-00783-3, "CAP CER 20PF 50V 5% NP0 0603", Capacitance="20 pF", Manufacturer=KEMET, Manufacturer Part Number=C0603C200J5GACTU, Package=C0603C-CF, Temperature="-55°C to +125°C", Temperature Characteristic=C0G, Temperature Coefficient=30ppm/°C, Temperature Range High=+125°C, Temperature Range Low=-55°C, Tolerance=0.05, Voltage Rating="50 V", Automotive=Yes, Automotive Grade="Grade 1", Category=Cap, ComponentLink2Description=Datasheet, ComponentLink2URL=https://api.kemet.com/component-edge/download/datasheet/C0603C100J5GACAUTO.pdf, Device Class L1="Passive Components", Device Class L2=Capacitors, Device Class L3="Ceramic Capacitors", Digikey Description="CAP CER 20PF 50V 5% NP0 0603", Height=0.87mm, Lead Free=Yes, Material=Ceramic, Mouser Description="Multilayer Ceramic Capacitors MLCC - SMD/SMT 50volts 20pF C0G 5%", Octopart=https://octopart.com/c0603c200j5gactu-kemet-9138585, RoHS=TRUE
C5_DS1 C5_DS2 C5_DS3 C5_DS4 C10_LS1 C10_LS2 C10_LS3 C10_LS4 C10_LS5: library part CMP-2100-03641-2, "CAP CER 0.1UF 16V X7R 0402", Capacitance=0.10μF, Manufacturer=Murata, Manufacturer Part Number=GRM155R71C104KA88D, Package=GRM15, Temperature="-55°C to +125°C", Temperature Characteristic=X7R, Temperature Range High=+125°C, Temperature Range Low=-55°C, Tolerance=10%, Voltage Rating=16Vdc, Category=Cap, ComponentLink2Description=Datasheet, ComponentLink2URL=https://search.murata.co.jp/Ceramy/image/img/A01X/G101/ENG/GRM155R71H471KA01-01A.pdf, Device Class L1="Passive Components", Device Class L2=Capacitors, Device Class L3="Ceramic Capacitors", Digikey Description="CAP CER 0.1UF 16V X7R 0402", Height=0.55mm, Ipc Land Pattern Name=CAPC10050X219, Lead Free=yes, Material=Ceramic, Mouser Description="0402 0.1 uF 16V ±10 % Tolerance X7R SMT Multilayer Ceramic Capacitor", Octopart=https://octopart.com/grm155r71c104ka88d-murata-196880, RoHS=TRUE, Standoff Height=0mm
C16 C18 C19 C20 C21 C22 C23 C24 C26 C27 C28 C38: library part 0106031041050, "CAP, size 0603, 100 nF, 50 VDC", Manufacture Name=TDK, Manufacture SN=CGA3E3X8R1H104K080AE, Operating Temperature="-55 to +125degC", Tolerance=+/-10%, Voltage Rating DC="50 VDC", Capacitance="100 nF", ComponentLink2Description=Datasheet, ComponentLink2URL=https://product.tdk.com/system/files/dam/doc/product/capacitor/ceramic/mlcc/catalog/mlcc_automotive_soft_en.pdf?ref_disty=mouser, Mounting Technology=SMT, Packaging="Tape and Reel", Size=0603, Supplier 1 Name=Mouser, Supplier 1 SN=810-CGA3E3X8R1H104KA, Supplier 1 URL=https://www.mouser.com/ProductDetail/TDK/CGA3E3X8R1H104K080AE?qs=nQSIdc08i%252Bd8g3IRRgU2bw%3D%3D&utm_source=mouser-refine-download&utm_medium=file&utm_campaign=CGA3E3X8R1H104K080AE&utm_content=TDK, Supplier 2 Name=Digi-Key, Supplier 2 SN=445-173697-2-ND, Supplier 2 URL=https://www.digikey.com/en/products/detail/tdk-corporation/cga3e3x8r1h104k080ae/5809262, Supplier 3 Name=thegioiic, Supplier 3 SN=N/A, Supplier 3 URL=N/A
C17 C31 C34: library part 0106031061010, "CAP, size 0603, 10 uF, 10 VDC", Manufacture Name="Samsung Electro-Mechanics", Manufacture SN=CL10A106KP8NNWC, Operating Temperature="-55 to +125degC", Tolerance=+/-10%, Voltage Rating DC="10 VDC", Capacitance="10 uF", ComponentLink2Description=Datasheet, ComponentLink2URL=https://www.mouser.vn/datasheet/2/585/MLCC-1837944.pdf, Mounting Technology=SMT, Packaging="Tape and Reel", Size=0603, Supplier 1 Name=Mouser, Supplier 1 SN=187-CL10A106KP8NNWC, Supplier 1 URL=https://www.mouser.vn/ProductDetail/Samsung-Electro-Mechanics/CL10A106KP8NNWC?qs=xZ%2FP%252Ba9zWqZx8LSX23YqWA%3D%3D&utm_source=mouser-refine-download&utm_medium=file&utm_campaign=CL10A106KP8NNWC&utm_content=Samsung-Electro-Mechanics, Supplier 2 Name=Digi-Key, Supplier 2 SN=1276-CL10A106KP8NNWCTR-ND, Supplier 2 URL=https://www.digikey.com/en/products/detail/samsung-electro-mechanics/cl10a106kp8nnwc/16572907, Supplier 3 Name=thegioiic, Supplier 3 SN=N/A, Supplier 3 URL=https://www.thegioiic.com/tu-gom-0603-10uf-25v
C25: library part 0106031041050, "CAP, size 0603, 100 nF", Manufacture Name=TDK, Manufacture SN=CGA3E3X8R1H104K080AE, Operating Temperature="-55 to +125degC", Tolerance=+/-10%, Voltage Rating DC="50 VDC", Capacitance="100 nF", ComponentLink2Description=Datasheet, ComponentLink2URL=https://product.tdk.com/system/files/dam/doc/product/capacitor/ceramic/mlcc/catalog/mlcc_automotive_soft_en.pdf?ref_disty=mouser, Mounting Technology=SMT, Packaging="Tape and Reel", Size=0603, Supplier 1 Name=Mouser, Supplier 1 SN=810-CGA3E3X8R1H104KA, Supplier 1 URL=https://www.mouser.com/ProductDetail/TDK/CGA3E3X8R1H104K080AE?qs=nQSIdc08i%252Bd8g3IRRgU2bw%3D%3D&utm_source=mouser-refine-download&utm_medium=file&utm_campaign=CGA3E3X8R1H104K080AE&utm_content=TDK, Supplier 2 Name=Digi-Key, Supplier 2 SN=445-173697-2-ND, Supplier 2 URL=https://www.digikey.com/en/products/detail/tdk-corporation/cga3e3x8r1h104k080ae/5809262, Supplier 3 Name=thegioiic, Supplier 3 SN=N/A, Supplier 3 URL=N/A
C29: library part 0106031030550, "CAP, size 0603, 10 nF, 50 VDC", Manufacture Name=TDK, Manufacture SN=CGA3E2C0G1H103J080AE, Operating Temperature="-55 to +125degC", Tolerance=+/-5%, Voltage Rating DC="50 VDC", Capacitance="10 nF", ComponentLink2Description=Datasheet, ComponentLink2URL=https://product.tdk.com/system/files/dam/doc/product/capacitor/ceramic/mlcc/catalog/mlcc_automotive_soft_en.pdf?ref_disty=mouser, Mounting Technology=SMT, Packaging="Tape and Reel", Size=0603, Supplier 1 Name=Mouser, Supplier 1 SN=810-CGA3E2C0G1H103J8, Supplier 1 URL=https://www.mouser.com/ProductDetail/TDK/CGA3E2C0G1H103J080AE?qs=P1JMDcb91o6ZkMITrWTUZQ%3D%3D&utm_source=mouser-refine-download&utm_medium=file&utm_campaign=CGA3E2C0G1H103J080AE&utm_content=TDK, Supplier 2 Name=Digi-Key, Supplier 2 SN=445-CGA3E2C0G1H103J080AETR-ND, Supplier 2 URL=https://www.digikey.com/en/products/detail/tdk-corporation/cga3e2c0g1h103j080ae/11697946, Supplier 3 Name=thegioiic, Supplier 3 SN=N/A, Supplier 3 URL=N/A
C30 C32 C33: library part 0106031051016, "CAP, size 0603, 1 uF, 16 VDC", Manufacture Name="Samsung Electro-Mechanics", Manufacture SN=CL10B105KO8NNWC, Operating Temperature="-55 to +125degC", Tolerance=+/-10%, Voltage Rating DC="16 VDC", Capacitance="1 uF", ComponentLink2Description=Datasheet, ComponentLink2URL=https://www.mouser.vn/datasheet/2/585/Samsung_MLCC_1837944-1929650.pdf, Mounting Technology=SMT, Packaging="Tape and Reel", Size=0603, Supplier 1 Name=Mouser, Supplier 1 SN=187-CL10B105KO8NNWC, Supplier 1 URL=https://www.mouser.vn/ProductDetail/Samsung-Electro-Mechanics/CL10B105KO8NNWC?qs=81r%252BiQLm7BT%252BXtc72qn1ug%3D%3D&utm_source=mouser-refine-download&utm_medium=file&utm_campaign=CL10B105KO8NNWC&utm_content=Samsung-Electro-Mechanics, Supplier 2 Name=Digi-Key, Supplier 2 SN=1276-CL10B105KO8NNWCTR-ND, Supplier 2 URL=https://www.digikey.com/en/products/detail/samsung-electro-mechanics/cl10b105ko8nnwc/16572783, Supplier 3 Name=thegioiic, Supplier 3 SN=N/A, Supplier 3 URL=https://www.thegioiic.com/tu-gom-0603-1uf-16v
C35 C37: library part 0106032200550, "CAP, size 0603, 22 pF, 50 VDC", Manufacture Name=TDK, Manufacture SN=CGA3E2NP01H220J080AA, Operating Temperature="-55 to +125degC", Tolerance=+/-5%, Voltage Rating DC="50 VDC", Capacitance="22 pF", ComponentLink2Description=Datasheet, ComponentLink2URL=https://product.tdk.com/system/files/dam/doc/product/capacitor/ceramic/mlcc/catalog/mlcc_automotive_hightemp_en.pdf?ref_disty=mouser, Mounting Technology=SMT, Packaging="Tape and Reel", Size=0603, Supplier 1 Name=Mouser, Supplier 1 SN=810-CGA3E2NP01H220JA, Supplier 1 URL=https://www.mouser.com/ProductDetail/TDK/CGA3E2NP01H220J080AA?qs=xLDY6iXSiQbIDiPJq57tVA%3D%3D&utm_source=mouser-refine-download&utm_medium=file&utm_campaign=CGA3E2NP01H220J080AA&utm_content=TDK, Supplier 2 Name=Digi-Key, Supplier 2 SN=445-12401-2-ND, Supplier 2 URL=https://www.digikey.com/en/products/detail/tdk-corporation/cga3e2np01h220j080aa/3949637, Supplier 3 Name=thegioiic, Supplier 3 SN=N/A, Supplier 3 URL=N/A
C36: library part 0106031051035, "CAP, size 0603, 1 uF, 35 VDC", Manufacture Name="Samsung Electro-Mechanics", Manufacture SN=CL10B105KL9VPJC, Operating Temperature="-55 to +125degC", Tolerance=+/-10%, Voltage Rating DC="35 VDC", Capacitance="1 uF", ComponentLink2Description=Datasheet, ComponentLink2URL=https://www.mouser.vn/datasheet/2/585/Samsung_3_7_2023_CL21Y106KABVPN_Specsheet-3106720.pdf, Mounting Technology=SMT, Packaging="Tape and Reel", Size=0603, Supplier 1 Name=Mouser, Supplier 1 SN=187-CL10B105KL9VPJC, Supplier 1 URL=https://www.mouser.vn/ProductDetail/Samsung-Electro-Mechanics/CL10B105KL9VPJC?qs=Jm2GQyTW%2Fbg7HPXOYntRzg%3D%3D&utm_source=mouser-refine-download&utm_medium=file&utm_campaign=CL10B105KL9VPJC&utm_content=Samsung-Electro-Mechanics, Supplier 2 Name=Digi-Key, Supplier 2 SN=N/A, Supplier 2 URL=N/A, Supplier 3 Name=thegioiic, Supplier 3 SN=N/A, Supplier 3 URL=N/A
C39 C40: library part 0106033300550, "CAP, size 0603, 33 pF, 50 VDC", Capacitance="33 pF", Manufacture Name=TDK, Manufacture SN=CGA3E2NP01H330J080AA, Operating Temperature="-55 to +125degC", Tolerance=+/-5%, Voltage Rating DC="50 VDC", ComponentLink2Description=Datasheet, ComponentLink2URL=https://product.tdk.com/system/files/dam/doc/product/capacitor/ceramic/mlcc/catalog/mlcc_automotive_hightemp_en.pdf?ref_disty=mouser, Mounting Technology=SMT, Packaging="Tape and Reel", Size=0603, Supplier 1 Name=Mouser, Supplier 1 SN=810-CGA3E2NP01H330JA, Supplier 1 URL=https://www.mouser.com/ProductDetail/TDK/CGA3E2NP01H330J080AA?qs=xLDY6iXSiQZLs28ZlT4aFg%3D%3D&utm_source=mouser-refine-download&utm_medium=file&utm_campaign=CGA3E2NP01H330J080AA&utm_content=TDK, Supplier 2 Name=Digi-Key, Supplier 2 SN=445-12409-2-ND, Supplier 2 URL=https://www.digikey.com/en/products/detail/tdk-corporation/cga3e2np01h330j080aa/3949645, Supplier 3 Name=thegioiic, Supplier 3 SN=N/A, Supplier 3 URL=N/A
D1_DS1 D1_DS2 D1_DS3 D1_DS4: "Red 640nm LED Indication - Discrete 1.85V Radial", Case/Package="Radial Kingbright", Availability=Unavailable, Component Type=Standard, Design Item ID=WP7113SRC/DU, MF=Kingbright, MP=WP7113SRC/DU, Pins=2, Price=1000VND, SnapEDA_Link=https://www.snapeda.com/parts/WP7113SRC/DU/Kingbright/view-part/826988/?ref=snap, Source=SnapEDAsch.SchLib
D2_LS1 D2_LS2 D2_LS3 D2_LS4 D2_LS5: "Red 640nm LED Indication - Discrete 1.85V Radial", Package="Radial Kingbright", Availability=Unavailable, MF=Kingbright, MP=WP7113SRC/DU, Price=None, SnapEDA_Link=https://www.snapeda.com/parts/WP7113SRC/DU/Kingbright/view-part/826988/?ref=snap
D5 D6: library part 160603RedClear, "WL-SMCW SMT Mono-color Chip LED Waterclear, size 0603, Red, 2V, 140deg", Color=Red, ComponentLink1Description="Datasheet link", ComponentLink1URL=N/A, ComponentLink2Description="Supplier 1 URL", ComponentLink2URL=https://www.mouser.vn/ProductDetail/Wurth-Elektronik/150060RS75000?qs=LlUlMxKIyB3QnmZ3fw%2FVCA%3D%3D, ComponentLink3Description="Supplier 2 URL", ComponentLink3URL=https://www.digikey.com/en/products/detail/liteon/LTST-C191KRKT/386837, ComponentLink4Description="Supplier 3 URL", ComponentLink4URL=https://www.thegioiic.com/led-do-0603-dan-smd-trong-suot, Size=0603, Supplier 1 Name=Mouser, Supplier 1 SN=710-150060RS75000, Supplier 1 URL=https://www.mouser.vn/ProductDetail/Wurth-Elektronik/150060RS75000?qs=LlUlMxKIyB3QnmZ3fw%2FVCA%3D%3D, Supplier 2 Name=Digi-Key, Supplier 2 SN=160-1447-2-ND, Supplier 2 URL=https://www.digikey.com/en/products/detail/liteon/LTST-C191KRKT/386837, Supplier 3 Name=ICDayRoi, Supplier 3 SN=N/A, Supplier 3 URL=https://www.thegioiic.com/led-do-0603-dan-smd-trong-suot, Type=Clear
DS1_LS1 DS1_LS2 DS1_LS3 DS1_LS4 DS1_LS5: library part CMP-007-00016-2, "LED Uni-Color White, 78 mW, 20 mA, -40 to 85 degC, 2-Pin SMD, RoHS, Tape and Reel", Case/Package=0603, Colour=White, Forward Current=20mA, Forward Voltage=3.6V, Manufacturer=Avago, Max Operating Temperature=85°C, Min Operating Temperature=-40°C, Package Description="2-Pin Surface Mount Device, Body 1.6 x 0.8 mm", Package Quantity=4000, Package Reference=HSMW-C191, Power=78mW, Datasheet URL=http://docs.avagotech.com/docs/AV02-0186EN, Datasheet Version=May-10, Illumination Colour=White, Lens Style=Diffused, Luminous Intensity=200mcd, Manufacturer URL=http://www.avagotech.com/, Mounting Technology=SM, Nominal Vf=3.6V, Packaging=TapeandReel, Pins=2, RoHS Compliant=True, Viewing Angle=140degrees
FB1: library part CMP-0686-00716-3, "FERRITE BEAD 120 OHM 0805 1LN", Case Code (Imperial)=0805, Case Code (Metric)=2012, Current Rating=800mA, DC Current=200mA, DC Resistance (DCR)=100mR, Frequency=100MHz, Max Current Rating=1A, Max Operating Temperature=125°C, Min Operating Temperature=-55°C, Package Quantity=1, Resistance=150mR, Tolerance=25%, Case/Package=0805, Core Material=Ferrite, DC Resistance-Max=100mR, Depth=1.25mm, Height=0.85mm, Impedance=120R, Lead Free="Lead Free", Length=2mm, Material=Steel, Max DC Current=200mA, Military Standard=Not, Number of Circuits=1, Number of Lines=1, Number of Pins=2, Packaging="Tape and Reel", Radiation Hardening=No, REACH SVHC="No SVHC", Series=BLM21A, Shielding=Unshielded, Termination=SMD/SMT, Test Frequency=100MHz, Width=1.25mm
J2: Package=None, Availability=Unavailable, MF="{'manufacturer': u'JST Sales America Inc.'}", MP=B2B-XH-A, Price=None, System=Connector
P1: "WR-PHD Pin Header, THT, pitch 2.54mm, Dual Row, Vertical, 6p", Contact Resistance=20mOhm, Manufacturer="Wurth Elektronik", Operating Temperature="-40 to +105degC", Rated Current=3A, Withstanding Voltage=500VAC, Working Voltage=250VAC, ComponentLink1Description=Manufacturer, ComponentLink1URL=http://www.we-online.de, ComponentLink2Description=Datasheet, ComponentLink2URL=https://www.we-online.com/catalog/datasheet/61300621121.pdf, ComponentLink3Description="Global Supply", ComponentLink3URL=https://www.we-online.com/en/components/products/PHD_2_54_THT_DUAL_PIN_HEADER_6130XX21121?sq=61300621121#61300621121, ComponentLink4Description="Global Supply", ComponentLink4URL=https://www.mouser.vn/ProductDetail/Wurth-Elektronik/61300621121?qs=PhR8RmCirEb94hrEcn0AQg%3D%3D, Gender="Pin Header", Manufacturer Part Number=61300621121, Mounting Technology=THT, Orientation=Vertical, Packaging=Bag, Pin Number=6, Pitch=2.54mm, Published Date="May 2020", Row Number=Dual, Supplier 1 Name=Mouser, Supplier 1 SN=710-61300621121, Supplier 1 URL=https://www.mouser.vn/ProductDetail/Wurth-Elektronik/61300621121?qs=PhR8RmCirEb94hrEcn0AQg%3D%3D, Supplier 2 Name=Digi-Key, Supplier 2 SN=N/A, Supplier 2 URL=N/A, Supplier 3 Name=thegioiic, Supplier 3 SN=N/A, Supplier 3 URL=N/A, Supply name 1=Mouser
P2: "WR-PHD Pin Header, THT, pitch 2.54mm, Single Row, Vertical, 4p", Contact Resistance=20mOhm, Manufacturer="Wurth Elektronik", Operating Temperature="-40 to +105degC", Rated Current=3A, Withstanding Voltage=500VAC, Working Voltage=250VAC, ComponentLink1Description=Manufacturer, ComponentLink1URL=http://www.we-online.de, ComponentLink2Description=Datasheet, ComponentLink2URL=https://www.we-online.com/catalog/datasheet/61300411121.pdf, ComponentLink3Description="Global Supply", ComponentLink3URL=https://www.we-online.com/en/components/products/PHD_2_54_THT_PIN_HEADER_6130XX11121?sq=61300411121#61300411121, ComponentLink4Description="Global Supply", ComponentLink4URL=https://www.mouser.vn/ProductDetail/Wurth-Elektronik/61300411121?qs=PhR8RmCirEYQcLLqXD8rAA%3D%3D, Gender="Pin Header", Manufacturer Part Number=61300411121, Mounting Technology=THT, Orientation=Vertical, Packaging=Bag, Pin Number=4, Pitch=2.54mm, Published Date="May 2020", Row Number=Single, Supplier 1 Name=Mouser, Supplier 1 SN=710-61300311121, Supplier 1 URL=https://www.mouser.vn/ProductDetail/Wurth-Elektronik/61300311121?qs=PhR8RmCirEYxRWFJzNKsUw%3D%3D, Supplier 2 Name=Digi-Key, Supplier 2 SN=N/A, Supplier 2 URL=N/A, Supplier 3 Name=thegioiic, Supplier 3 SN=N/A, Supplier 3 URL=N/A, Supply name 1=Mouser
P3: library part CMP-002-01223-1, "WR-WTB SMT Male Vertical Shrouded Header, pitch 1mm, 3p", Contact Resistance=20mOhm, Operating Temperature="-25 to +85degC", Rated Current=1A, Withstanding Voltage=500VAC, Working Voltage=50VAC, Component Type=Standard, ComponentLink1Description=Manufacturer, ComponentLink1URL=http://www.we-online.de, ComponentLink2Description=Datasheet, ComponentLink2URL=https://www.we-online.com/catalog/datasheet/665303124022.pdf, ComponentLink3Description="Global Supply", ComponentLink3URL=https://www.we-online.com/en/components/products/WTB_1_00_SMT_MALE_VERTICAL_SHROUDED_HEADER_6653XX124022?sq=665303124022#665303124022, ComponentLink4Description="Global Supply", ComponentLink4URL=https://www.mouser.vn/ProductDetail/Wurth-Elektronik/665303124022?qs=a9WhcLg8qCyV5ri9HU4hCQ%3D%3D, Design Item ID=665303124022, Gender=Male, Mounting Technology=SMT, Packaging="Tape and Reel", Part Number=665303124022, Pin Number=3, Pins=3, Pitch=1mm, Published Date="January 2020", Publisher="Wurth Elektronik", Source=WR-WTB_1.00mm.SchLib, Supplier 1 Name=Mouser, Supplier 1 SN=710-665303124022, Supplier 1 URL=https://www.mouser.vn/ProductDetail/Wurth-Elektronik/665303124022?qs=a9WhcLg8qCyV5ri9HU4hCQ%3D%3D, Supplier 2 Name=Digi-Key, Supplier 2 SN=N/A, Supplier 2 URL=N/A, Supplier 3 Name=thegioiic, Supplier 3 SN=N/A, Supplier 3 URL=N/A, Type=Vertical
P4: library part CMP-002-01224-1, "WR-WTB SMT Male Vertical Shrouded Header, pitch 1mm, 4p", Contact Resistance=20mOhm, Operating Temperature="-25 to +85degC", Rated Current=1A, Withstanding Voltage=500VAC, Working Voltage=50VAC, Component Type=Standard, ComponentLink1Description=Manufacturer, ComponentLink1URL=http://www.we-online.de, ComponentLink2Description=Datasheet, ComponentLink2URL=https://www.we-online.com/catalog/datasheet/665304124022.pdf, ComponentLink3Description="Global Supply", ComponentLink3URL=https://www.we-online.com/en/components/products/WTB_1_00_SMT_MALE_VERTICAL_SHROUDED_HEADER_6653XX124022?sq=665304124022#665304124022, ComponentLink4Description="Global Supply", ComponentLink4URL=https://www.mouser.vn/ProductDetail/Wurth-Elektronik/665304124022?qs=a9WhcLg8qCx8aEna1KcTfg%3D%3D, Design Item ID=665304124022, Gender=Male, Mounting Technology=SMT, Packaging="Tape and Reel", Part Number=665304124022, Pin Number=4, Pins=4, Pitch=1mm, Published Date="January 2020", Publisher="Wurth Elektronik", Source=WR-WTB_1.00mm.SchLib, Supplier 1 Name=Mouser, Supplier 1 SN=710-665304124022, Supplier 1 URL=https://www.mouser.vn/ProductDetail/Wurth-Elektronik/665304124022?qs=a9WhcLg8qCx8aEna1KcTfg%3D%3D, Supplier 2 Name=Digi-Key, Supplier 2 SN=N/A, Supplier 2 URL=N/A, Supplier 3 Name=thegioiic, Supplier 3 SN=N/A, Supplier 3 URL=N/A, Type=Vertical
Q1_DS1 Q1_DS2 Q1_DS3 Q1_DS4 Q3_LS1 Q3_LS2 Q3_LS3 Q3_LS4 Q3_LS5: "Phototransistors 870nm Top View Radial - 2 Leads", Package="Radial-2 Osram Opto", Check_prices=https://www.snapeda.com/parts/SFH%20313%20FA-3/4/OSRAM%20Opto%20Semiconductors%20Inc./view-part/240737/?ref=eda, Digi-Key_Part_Number=475-3328-ND, MF="OSRAM Opto", MP="SFH 313 FA-3/4", SnapEDA_Link=https://www.snapeda.com/parts/SFH%20313%20FA-3/4/OSRAM%20Opto%20Semiconductors%20Inc./view-part/240737/?ref=snap
Q2_DS1 Q2_DS2 Q2_DS3 Q2_DS4 Q4_LS1 Q4_LS2 Q4_LS3 Q4_LS4 Q4_LS5: library part CMP-1048-00736-1, "General Purpose Transistor, NPN Silicon, 3-Pin SOT-23, Pb-Free, Tape and Reel", Manufacturer="On Semiconductor", ComponentLink1Description="Manufacturer URL", ComponentLink1URL=http://www.onsemi.com/, ComponentLink2Description=Datasheet, ComponentLink2URL=http://www.onsemi.com/pub_link/Collateral/BC817-16LT1-D.PDF, ComponentLink3Description="Package Specification", ComponentLink3URL=http://www.onsemi.cn/pub_link/Collateral/318-08.PDF, DatasheetVersion="Rev. 12", fT Min (MHz)=100, IC Continuous (A)=0.5, Mounting Technology="Surface Mount", PackageDescription="3-Pin Small Outline Transistor, Body 2.92 x 1.3 mm, Pitch 0.95 mm", PackageReference=SOT-23-3-318-08, PackageVersion="Rev. AP, 11/2009", Packing="Tape and Reel", PartNumber=BC817-16LT1G, Polarity=NPN, RoHS=TRUE
R1_DS1 R1_DS2 R1_DS3 R1_DS4 R4_LS1 R4_LS2 R4_LS3 R4_LS4 R4_LS5: library part CMP-2000-06934-1, "Thick Film Resistor, 2.2 KOhm, 100 mW, 50 V, +/- 1%, -55 to 155 degC, 2-Pin SMD (0603), RoHS, Tape and Reel", Case Code - in=0603, Case Code - mm=1608, Manufacturer=Yageo, Operating Temperature Range=-55Cto+155C, Package Description="2-Pin Surface Mount Device, Body 1.6 x 0.8 mm", Power Rating=100mW, Resistance=2.2kOhms, Temperature Coefficient=100PPM/C, Tolerance=1%, Voltage Rating=50V, Datasheet URL=http://www.yageo.com/documents/recent/PYu-RC_Group_51_RoHS_L_7.pdf, Datasheet Version="Rev. 7, 05/2017", Manufacturer URL=http://www.yageo.com/, Mounting Technology=SurfaceMount, Package Reference=0603, Packaging=Reel, Product=ThickFilmResistorsGeneralPurpose, Series=RC, Termination Style=SMD/SMT
R2_DS1 R2_DS2 R2_DS3 R2_DS4 R5_LS1 R5_LS2 R5_LS3 R5_LS4 R5_LS5: library part CMP-2000-07451-1, "0402 , 1KOhm", Case Code (Imperial)=0402, Case Code (Metric)=1005, Manufacturer=Panasonic, Max Operating Temperature=155degC, Max Power Dissipation=100mW, Min Operating Temperature=-55degC, Package Description="2-Pin Surface Mount Device, Body 1 x 0.5 mm", Package Quantity=1, Package Reference=402, Resistance=0mOhm, Temperature Coefficient=600ppm/��C, Tolerance=5%, Voltage Rating=50V, Case/Package=0402, Composition=ThickFilm, Contact Plating=Tin, Datasheet URL=https://industrial.panasonic.com/cdbs/www-data/pdf/RDA0000/AOA0000C301.pdf, Datasheet Version=03/2015, Depth=0.5mm, Height=0.35mm, Lead Free=LeadFree, Length=1mm, Manufacturer URL=http://www.panasonic.com/, Military Standard=Not, Mount=SurfaceMount, Mounting Technology=SurfaceMount, Number of Terminations=2, Packaging=TapeandReel, Power Rating=100mW, Radiation Hardening=No, REACH SVHC=NoSVHC, RoHSCompliant=True, Termination=SMD/SMT, Voltage Rating (DC)=50V, Width=0.02inch